# Altium PCB 03按键.PcbDoc (part 3 of 3)
Units mil, origin at the board's own origin, x right, y up, seen from the top; angles counter-clockwise.
Board outline 1673 x 1444 mil, 2 copper layers (Top Layer, Bottom Layer); 1 components, 7 nets, 11 pads, 20 vias.
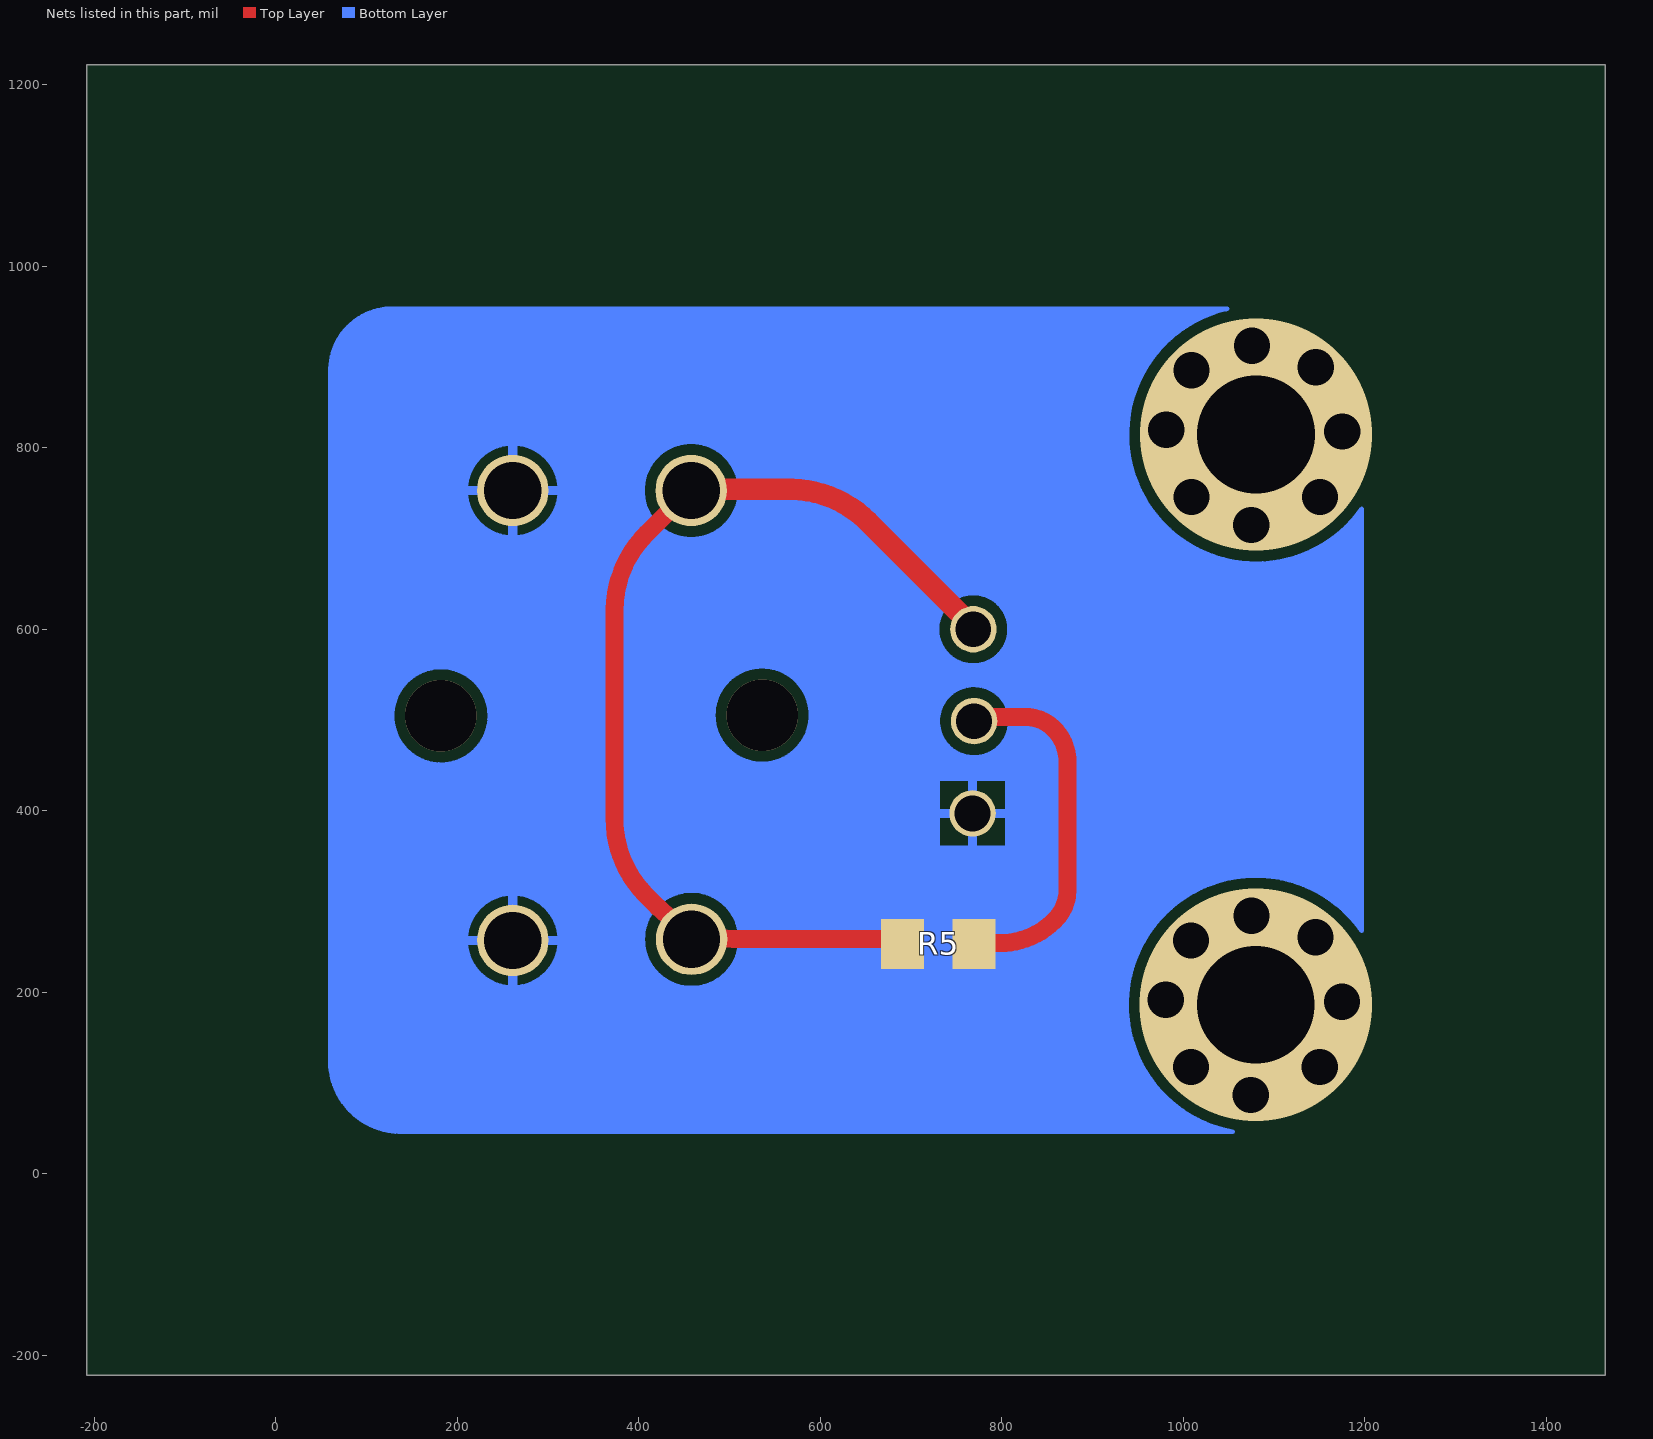
[diagram p3: the nets of this part, all layers, seen from the top]

## Via types
v1: diameter 40, hole 40, Top Layer to Bottom Layer, 16 vias
v2: diameter 255.91, hole 129.92, Top Layer to Bottom Layer, 2 vias
v3: diameter 78.74, hole 78.74, Top Layer to Bottom Layer, 2 vias

## Nets (pads, with @x,y where several pads share a name; then routed paths per layer and width w, separated by ;. In a path a pad name is that pad's centre, name@x,y a point inside that pad or via, vN(x,y) a via of type N, cw(c..) or ccw(c..) an arc to the next point about the centre after c; other vN are vias at no path point) (continued)
$Net0: (continued)
  Bottom Layer w5: 759.96,460.14 762.68,459.56 765.44,459.17 768.22,458.97 771,458.97 773.78,459.17 776.54,459.56 779.26,460.14 781.94,460.9 784.56,461.86 787.1,462.99 789.56,464.3 791.92,465.77 794.17,467.41 796.31,469.2 798.31,471.13 800.18,473.2 801.89,475.4 803.45,477.71 804.84,480.12 806.06,482.62 807.1,485.2 807.96,487.85 808.64,490.55 809.12,493.3 809.41,496.07 809.51,498.85 809.41,501.63 809.12,504.4 808.64,507.15 807.96,509.85 807.1,512.5 806.06,515.08 804.84,517.58 803.45,519.99 801.89,522.3 800.18,524.5 798.31,526.57 796.31,528.5 794.17,530.29 791.92,531.93 789.56,533.4 787.1,534.71 784.56,535.84 781.94,536.8 779.26,537.56 776.54,538.14 773.78,538.53 771,538.73 768.22,538.73 765.44,538.53 762.68,538.14 759.96,537.56 ; 759.96,460.14 757.28,460.9 754.66,461.86 752.12,462.99 749.66,464.3 747.3,465.77 745.05,467.41 742.91,469.2 740.91,471.13 739.04,473.2 737.33,475.4 735.77,477.71 734.38,480.12 733.16,482.62 732.12,485.2 731.26,487.85 730.58,490.55 730.1,493.3 729.81,496.07 729.71,498.85 729.81,501.63 730.1,504.4 730.58,507.15 731.26,509.85 732.12,512.5 733.16,515.08 734.38,517.58 735.77,519.99 737.33,522.3 739.04,524.5 740.91,526.57 742.91,528.5 745.05,530.29 747.3,531.93 749.66,533.4 752.12,534.71 754.66,535.84 757.28,536.8 759.96,537.56 ; 937.79,189.02 938.32,198.94 939.55,208.79 941.45,218.54 944.03,228.12 947.28,237.51 951.17,246.64 955.69,255.49 960.81,263.99 966.52,272.12 972.77,279.83 979.55,287.08 986.83,293.85 994.55,300.09 1002.69,305.77 1011.21,310.88 1020.06,315.37 1029.2,319.24 1038.6,322.46 1048.19,325.02 ; 1048.19,325.02 1057.94,326.91 1067.8,328.1 1077.72,328.61 1087.64,328.43 1097.53,327.55 1107.34,325.99 1117.01,323.74 1126.5,320.83 1135.77,317.26 1144.77,313.05 1153.44,308.23 1161.77,302.81 1169.69,296.82 1177.17,290.3 1184.19,283.27 1190.69,275.77 1196.66,267.83 1196.66,732.63 1193.78,728.7 1187.51,721 ; 728.88,600.1 728.98,597.32 729.27,594.55 729.75,591.8 730.43,589.1 731.29,586.45 732.33,583.87 733.55,581.37 734.94,578.96 736.5,576.65 738.21,574.45 740.08,572.38 742.08,570.45 744.22,568.66 746.47,567.02 748.83,565.55 751.29,564.24 753.83,563.11 756.45,562.15 759.13,561.39 761.85,560.81 764.61,560.42 767.39,560.22 770.17,560.22 772.95,560.42 775.71,560.81 778.43,561.39 781.11,562.15 783.73,563.11 786.27,564.24 788.73,565.55 791.09,567.02 793.34,568.66 795.48,570.45 797.48,572.38 799.35,574.45 801.06,576.65 802.62,578.96 804.01,581.37 805.23,583.87 806.27,586.45 807.13,589.1 807.81,591.8 808.29,594.55 808.58,597.32 808.68,600.1 808.58,602.88 808.29,605.65 807.81,608.4 807.13,611.1 806.27,613.75 805.23,616.33 804.01,618.83 802.62,621.24 801.06,623.55 799.35,625.75 797.48,627.82 795.48,629.75 793.34,631.54 791.09,633.18 788.73,634.65 786.27,635.96 783.73,637.09 781.11,638.05 778.43,638.81 775.71,639.39 772.95,639.78 770.17,639.98 767.39,639.98 764.61,639.78 761.85,639.39 759.13,638.81 756.45,638.05 753.83,637.09 751.29,635.96 748.83,634.65 746.47,633.18 744.22,631.54 742.08,629.75 740.08,627.82 738.21,625.75 736.5,623.55 734.94,621.24 733.55,618.83 732.33,616.33 731.29,613.75 730.43,611.1 729.75,608.4 729.27,605.65 728.98,602.88 728.88,600.1 ; 729.86,359.1 806.05,359.1 806.05,435.29 729.86,435.29 729.86,359.1
  Bottom Layer w10: 211.91,257.19 pad.3@261.28,257.19 ; 211.9,753.01 pad.3@261.27,753.01 ; 261.27,703.64 pad.3@261.27,753.01 ; 261.27,802.38 pad.3@261.27,753.01 ; 261.28,207.82 pad.3@261.28,257.19 ; 261.28,306.56 pad.3@261.28,257.19 ; 310.65,257.19 pad.3@261.28,257.19 ; 310.64,753.01 pad.3@261.27,753.01 ; 732.37,397.19 pad.2@767.96,397.19 ; 767.96,361.6 pad.2@767.96,397.19 ; 767.96,432.78 pad.2@767.96,397.19 ; 803.54,397.19 pad.2@767.96,397.19
$Net1: pad.1@768.36,253.85 pad.2@769.61,498.85 R5.1 | length 409.2
  Top Layer w19.68: R5.1@770.44,254.26 798,254.26 803.95,254.47 809.88,255.09 815.75,256.13 821.53,257.57 827.19,259.41 832.71,261.64 838.07,264.25 843.23,267.23 848.17,270.56 852.86,274.23 857.29,278.21 858.35,279.26 858.98,279.88 861.18,282.24 863.22,284.75 865.07,287.4 866.73,290.17 868.2,293.04 869.46,296.02 870.51,299.07 871.35,302.19 871.96,305.36 872.36,308.57 872.53,311.79 872.53,312.6 ; pad.2@770.43,503.45 826.29,503.45 827.06,503.44 830.14,503.28 833.2,502.9 836.23,502.31 839.2,501.52 842.12,500.51 844.96,499.31 847.7,497.91 850.34,496.32 852.87,494.55 855.27,492.61 857.52,490.51 858.15,489.87 860.54,487.22 862.74,484.4 864.74,481.44 866.53,478.34 868.09,475.13 869.43,471.81 870.54,468.42 871.4,464.95 872.02,461.43 872.4,457.87 872.52,454.3 ; 872.54,311.41 872.54,458.03
$Net2: pad.1@696.89,253.43 pad.2@768.78,600.1 pad.3@457.94,753 pad.3@458.36,258.42 R5.2 | length 1125.8
  Top Layer w19.68: pad.3@460.85,751.76 459.87,751.73 458.89,751.62 457.92,751.45 456.97,751.21 456.03,750.91 455.12,750.54 454.24,750.11 453.39,749.62 452.57,749.07 451.8,748.47 451.07,747.81 450.9,747.64 408.72,705.46 402.97,699.3 397.67,692.75 392.84,685.85 388.5,678.63 384.68,671.12 381.38,663.37 378.64,655.4 376.46,647.26 374.85,638.99 373.83,630.63 373.39,622.22 373.36,620.1 373.36,391.77 373.65,383.35 374.53,374.97 376,366.67 378.04,358.5 380.64,350.48 383.8,342.67 387.49,335.1 391.7,327.8 396.41,320.82 401.6,314.18 407.24,307.92 408.72,306.41 420.92,294.21 427.08,288.46 433.63,283.16 440.53,278.33 447.75,273.99 455.26,270.17 463.01,266.87 470.98,264.13 479.12,261.95 487.39,260.34 495.75,259.32 504.16,258.88 506.28,258.85 R5.2@690.03,258.85 ; pad.2@764.03,607.35 764.49,606.92 764.98,606.52 765.5,606.16 766.04,605.83 766.6,605.55 767.19,605.3 767.78,605.09 768.39,604.93 769.01,604.81 769.64,604.73 770.27,604.7 pad.2@770.44,604.7
  Top Layer w23.62: pad.3@485.44,754.26 567.12,754.26 569.24,754.23 577.65,753.79 586.01,752.77 594.28,751.16 602.42,748.98 610.39,746.24 618.14,742.94 625.65,739.12 632.87,734.78 639.77,729.95 646.32,724.65 652.48,718.9 pad.2@764.03,607.35
$Net3: 
  other v1: 1074.62,86.79 1008.77,117.61 1150.44,117.62 1175.03,189.71 980.87,191.79 1008.78,257.21 1145.87,260.54 1075.44,284.3
  other v2: 1080.02,186.37
$Net4: 
  other v1: 1075.03,715.1 1009.18,745.93 1150.85,745.93 1175.44,818.02 981.28,820.1 1009.19,885.52 1146.28,888.85 1075.85,912.61
  other v2: 1080.44,814.68
$Net5: 
  other v3: 182.11,504.69
$Net6: 
  other v3: 536.07,505.5

## Polygon pours and split planes (outlines as drawn)
no net on Top Overlay (hatched Horizontal grid 1 track 1): 377.39,102.49 365.34,102.49 365.34,102.91 365.34,102.51 365.34,101.95 365.34,101.23 365.34,100.34 365.34,99.2 365.26,98.02 365.26,96.66 365.26,95.21 365.17,93.62 365.17,91.92 365.09,90.23 364.93,86.63 364.8,83.54 377.39,83.54
no net on Top Overlay (hatched Horizontal grid 1 track 1): 143.97,85.83 130.14,85.83 124.28,73.53 123.63,73.53 124.04,73.43 124.42,73.28 125.05,73.2 125.76,72.96 126.57,72.8 127.55,72.55 128.58,72.24 130.83,71.67 133.16,70.95 135.57,70.31 137.51,69.68 137.3,69.43 137.37,69.62 137.63,70.15 137.93,70.67 138.27,71.42 138.73,72.18 139.14,73.16 139.71,74.28 140.26,75.46 140.81,76.81 141.37,78.26 141.93,79.69 142.49,81.29 143.12,82.94
no net on Top Overlay (hatched Horizontal grid 1 track 1): 189 vertices, not listed, extent 334.03,51.91 392.39,121.62
no net on Top Overlay (hatched Horizontal grid 1 track 1): 170 vertices, not listed, extent 110.41,52.52 157.37,102.18
no net on Top Overlay (hatched Horizontal grid 1 track 1): 182.29,118.59 180.27,116.83 180.27,116.73 180.25,116.71 180.16,116.42 179.99,116.09 179.65,115.26 179.27,114.23 178.78,113.03 178.21,111.66 177.01,108.25 184.02,108.25 186.76,111.08 190.19,107.41 176.58,107.41 176.58,107.04 176.51,106.97 176.3,106.56 176.14,106.15 175.93,105.64 175.6,105.07 174.89,103.64 174,102.11 173.13,100.43 172.17,98.76 170.74,96.4 182.5,96.4 185.25,99.22 188.65,95.64 180.27,95.64 180.27,82.54 183.69,82.54 186.51,85.29 189.87,81.7 180.27,81.7 180.27,62.77 189.1,68.1 189.18,67.97 189.44,68.22 189.07,67.94 188.67,67.45 188.13,66.92 187.39,66.27 186.58,65.45 184.82,63.69 182.89,61.77 181.04,59.83 180.15,58.86 179.41,57.96 178.77,57.16 178.62,56.97 176.29,60.24 176.16,60.1 176.25,60.38 176.48,60.69 176.76,61.33 176.92,62.01 177.17,62.93 177.26,63.95 177.34,65.16 177.34,81.7 175.86,81.7 175.08,81.62 174.08,81.62 172.93,81.46 171.73,81.3 170.42,81.13 169.38,80.87 167.72,82.54 177.34,82.54 177.34,95.64 170.54,95.64 170.29,95.39 170.04,95.05 169.73,94.67 169.25,94.11 168.68,93.45 168.14,92.74 167.06,91.54 166.92,91.63 166.78,91.35 167.02,91.76 167.43,92.5 167.92,93.47 168.56,94.76 169.28,96.2 170.08,97.89 170.97,99.82 171.85,101.92 172.75,104.25 173.71,106.74 174.6,109.49 175.48,112.3 176.36,115.27 177.17,118.41 177.74,120.98
no net on Top Overlay (hatched Horizontal grid 1 track 1): 108.63,118.03 106.33,116.2 106.33,103.69 108.89,103.69 111.72,106.52 115.34,102.85 106.33,102.85 106.33,88.48 114.49,93.48 114.68,93.12 106.33,86.9 106.33,58.61 106.33,58.53 106.33,58.45 106.27,58.26 106.19,57.86 105.97,57.05 105.5,55.95 105.21,55.35 104.83,54.75 104.4,54.16 103.85,53.62 103.16,52.99 102.48,52.46 101.66,51.93 101.33,51.78 101.33,51.08 101.33,51.24 101.14,51.8 100.88,52.55 100.6,53.11 100.25,53.57 99.75,54.15 99.24,54.66 98.56,55.26 97.73,55.75 96.83,56.32 95.75,56.91 94.43,57.4 93.4,57.76 93.4,58.35 93.06,58.35 93.25,58.29 93.71,58.19 94.67,58.12 95.8,57.95 97.07,57.79 98.29,57.63 99.49,57.55 100.4,57.47 100.59,57.47 100.85,57.56 101.33,57.66 101.86,57.97 102.25,58.37 102.72,59.02 103,59.87 103.09,60.92 103.09,85.13 102.23,84.26 101.98,84.09 101.64,83.83 101.14,83.42 100.58,82.94 100.03,82.47 98.57,81.26 97.12,79.97 95.75,78.68 95.11,78.02 94.53,77.45 94.02,76.85 94.05,76.89 91.03,80.38 90.22,80.38 90.36,80.53 90.45,80.55 90.8,80.64 91.25,80.82 91.75,81.07 92.37,81.38 93.09,81.7 93.91,82.03 94.82,82.52 95.83,83.07 97.06,83.64 98.24,84.35 99.69,85.08 101.24,85.89 103.09,87.01 103.09,102.85 94.69,102.85 92.17,102.33 90.82,103.69 103.09,103.69 103.09,104.27 103.09,104.59 103.09,105.15 103.09,105.79 103.09,106.67 103.09,107.63 103.09,108.75 103.09,110.06 103.01,111.32 103.01,112.77 102.93,115.65 102.85,118.7 102.79,120.91
no net on Top Overlay (hatched Horizontal grid 1 track 1): 340.32,118 337.74,115.96 337.74,98.24 342.7,98.24 346.09,101.64 350.33,97.4 337.74,97.4 337.74,71.53 351.18,74.52 351.21,74.41 351.57,74.41 351.43,74.26 351.08,74.15 350.27,73.91 349.21,73.58 348,73.1 346.64,72.62 345.04,72.06 343.45,71.5 339.99,70.3 338.3,69.66 336.63,69.01 335.03,68.45 333.57,67.88 332.19,67.32 331.19,66.88 331.07,66.88 330.78,66.73 330.56,66.58 330.19,66.44 329.29,66.03 328.22,65.45 327.16,64.8 326.17,64.14 325.76,63.81 325.31,63.45 325,63.04 325.26,63.55 322.73,68.28 322.23,68.28 322.49,68.38 322.75,68.44 323.17,68.44 323.73,68.6 324.35,68.69 325.11,68.78 325.92,68.94 326.79,69.1 327.84,69.26 328.86,69.49 330.07,69.66 331.3,69.9 332.63,70.22 334.5,70.53 334.5,97.4 330.93,97.4 330.15,97.32 329.15,97.32 328,97.16 326.81,97 325.5,96.83 324.45,96.57 322.79,98.24 334.5,98.24 334.5,98.82 334.5,98.9 334.5,99.14 334.5,99.46 334.5,100.34 334.5,101.54 334.5,102.91 334.5,104.51 334.5,106.19 334.5,108.04 334.42,111.88 334.42,113.73 334.34,115.56 334.34,117.34 334.26,118.85 334.26,120.31 334.24,120.63
no net on Top Overlay (hatched Horizontal grid 1 track 1): 188 vertices, not listed, extent 181.14,52.34 237.35,113.49
no net on Top Overlay (hatched Horizontal grid 1 track 1): 158 vertices, not listed, extent 244.26,51.48 271.91,121.59
no net on Top Overlay (hatched Horizontal grid 1 track 1): 221.18,118.9 219.27,117.5 219.27,111.3 226.63,111.3 228.83,113.49 231.73,110.6 229.85,109.35 229.85,102.49 231.2,102.49 233.7,104.99 236.81,101.64 229.85,101.64 229.85,101.07 229.85,100.9 229.85,100.5 229.85,100.1 229.85,99.54 229.85,98.89 229.93,97.46 229.93,95.85 230.01,94.16 230.09,92.47 230.15,91.23 227.24,90.1 227.24,92.27 219.27,92.27 219.27,83.42 226.95,83.42 229.77,86.25 233.13,82.58 219.27,82.58 219.27,73.17 229.03,73.17 231.86,75.92 235.27,72.33 219.27,72.33 219.27,71.75 219.27,71.59 219.27,71.19 219.27,70.79 219.27,70.23 219.27,69.65 219.35,68.22 219.35,66.61 219.43,64.91 219.52,63.32 219.57,62.14 216.67,60.82 216.67,60.13 216.67,60.45 216.67,60.86 216.67,61.42 216.67,62.06 216.67,62.86 216.67,64.62 216.67,66.54 216.67,68.46 216.67,70.31 216.67,71.11 216.67,72.33 212.79,72.33 212.01,72.25 211,72.25 209.85,72.09 208.66,71.93 207.35,71.76 206.31,71.5 204.64,73.17 216.67,73.17 216.67,82.58 214.87,82.58 214.09,82.5 213.09,82.5 212.02,82.34 210.73,82.18 209.51,82.01 208.47,81.75 206.81,83.42 216.67,83.42 216.67,92.27 215.65,92.27 215.13,92.19 214.36,92.19 213.45,92.02 212.42,91.87 211.18,91.7 210.23,91.45 208.56,93.12 216.67,93.12 216.67,101.64 212.47,101.64 211.68,101.57 210.68,101.57 209.53,101.4 208.34,101.24 207.03,101.07 205.99,100.81 204.32,102.49 216.67,102.49 216.67,110.46 215.58,110.46 214.97,110.38 214.05,110.38 212.98,110.21 211.85,110.05 210.62,109.88 209.67,109.64 208.01,111.3 216.67,111.3 216.67,111.88 216.67,112.04 216.67,112.28 216.67,112.68 216.67,113.16 216.67,113.64 216.67,115.01 216.59,116.46 216.51,118.15 216.43,119.91 216.38,120.96
no net on Top Overlay (hatched Horizontal grid 1 track 1): 122.11,107.61 151.51,107.61 154.03,110.44 158,106.53 158.98,106.53 158.63,106.41 158.31,106.25 157.94,106.1 157.41,105.93 156.84,105.6 156.17,105.26 155.43,104.77 154.68,104.28 153.84,103.6 153.03,102.8 152.06,101.89 151.16,100.91 150.19,99.78 149.41,98.83 149.19,98.95 152.35,106.85 122.11,106.85 122.11,106.27 122.11,106.11 122.11,105.79 122.11,105.47 122.11,104.5 121.96,103.41 121.73,102.24 121.42,101.09 120.94,100.25 120.65,99.9 120.28,99.59 120.27,99.59 120.02,99.53 119.61,99.28 119.18,99.16 118.63,99.08 118.05,99 117.47,99.07 116.99,99.31 116.9,99.4 116.73,99.48 116.61,99.6 116.52,99.77 116.47,100.1 116.47,100.48 116.64,100.89 117.04,101.44 117.12,101.52 117.39,101.78 117.63,102.11 118.04,102.6 118.93,103.73 119.76,104.88 119.93,105.04 120.02,105.33 120.27,105.83 120.51,106.48 120.84,107.31 121.17,108.46 121.5,109.77 121.74,110.98 122.11,110.98
no net on Top Overlay (hatched Horizontal grid 1 track 1): 186 vertices, not listed, extent 263.56,51.46 314.61,102.93
no net on Top Overlay (hatched Horizontal grid 1 track 1): 130.7,121.18 131.01,120.98 131.3,120.84 132.11,120.28 133.13,119.57 134.17,118.77 135.27,117.99 136.22,117.19 137,116.49 137.08,116.41 137.27,116.22 137.49,115.92 137.8,115.47 138.1,114.94 138.4,114.35 138.53,113.75 138.53,113.08 138.53,113 138.53,112.82 138.48,112.6 138.33,112.16 138.12,111.66 137.75,111.23 137.38,110.7 136.77,110.17 136.76,110.15 136.65,110.12 136.4,110.05 136.17,110.05 135.95,110.14 135.6,110.5 135.47,110.76 135.25,111.13 135.12,111.52 134.97,112.12 134.97,112.28 134.86,112.6 134.79,112.82 134.54,113.65 134.05,114.8 133.48,116.09 132.67,117.73 131.6,119.52 130.54,121.01 130.92,121.23 130.65,121.23
no net on Top Overlay (hatched Horizontal grid 1 track 1): 300.93,119.23 298.65,117.5 298.65,111.54 305.37,111.54 308.85,115.01 313.08,110.78 298.65,110.78 298.65,110.12 298.65,109.72 298.65,109.06 298.73,108.27 298.73,107.37 298.81,106.39 298.89,105.43 298.94,104.85 295.73,103.7 295.73,110.78 284.4,110.78 284.4,104.82 281.15,103.17 281.15,102.43 281.14,102.43 281.23,102.95 281.23,103.67 281.31,104.71 281.39,105.85 281.39,107.2 281.47,108.74 281.47,110.78 273.38,110.78 270.87,110.19 269.47,111.54 281.47,111.54 281.47,112.12 281.47,112.2 281.47,112.44 281.47,112.84 281.47,113.24 281.47,113.72 281.47,114.93 281.39,116.46 281.31,118.23 281.23,120.23 281.18,121.58 286.34,119.22 284.4,117.74 284.4,111.54 295.73,111.54 295.73,112.12 295.73,112.28 295.73,112.52 295.73,112.92 295.73,113.4 295.73,113.96 295.73,115.33 295.65,116.94 295.57,118.79 295.49,120.71 295.44,121.88

## Keep-outs
Keep-Out Layer:
  lines w3.94: 43.98,123.95 43.98,885.37 ; 43.98,124.26 44.19,117.71 44.85,111.2 45.97,104.75 47.53,98.39 49.53,92.15 51.97,86.07 54.82,80.18 58.07,74.5 61.72,69.05 65.73,63.88 70.1,59 74.79,54.44 79.79,50.21 85.08,46.34 90.62,42.85 96.39,39.76 102.37,37.08 108.51,34.82 114.8,32.99 121.2,31.61 127.68,30.68 134.22,30.2 137.48,30.13 ; 43.98,885.65 44.04,888.59 44.47,894.46 45.31,900.29 46.55,906.05 48.19,911.7 50.23,917.22 52.64,922.59 55.42,927.78 58.56,932.76 62.03,937.52 65.83,942.01 69.93,946.23 74.32,950.16 78.97,953.77 83.86,957.04 88.97,959.97 94.27,962.53 99.74,964.72 105.34,966.52 111.06,967.93 116.86,968.93 122.72,969.52 128.6,969.71 ; 128.32,969.68 1134.18,969.68 ; 137.8,30.13 1144.34,30.13 ; 1134.44,969.6 1137.19,969.54 1142.67,969.14 1148.11,968.36 1153.49,967.2 1158.77,965.66 1163.92,963.77 1168.94,961.51 1173.79,958.92 1178.44,955.99 1182.87,952.74 1187.07,949.2 1191.02,945.36 1194.68,941.27 1198.05,936.92 1201.11,932.36 1203.84,927.59 1206.24,922.64 1208.28,917.53 1209.96,912.3 1211.27,906.96 1212.21,901.54 1212.77,896.07 1212.94,890.58 ; 1144.11,30.13 1148.9,30.28 1153.66,30.77 1158.38,31.58 1163.02,32.72 1167.58,34.19 1172.03,35.97 1176.34,38.05 1180.49,40.43 1184.47,43.09 1188.25,46.03 1191.82,49.22 1195.16,52.65 1198.25,56.31 1201.08,60.17 1203.63,64.23 1205.89,68.45 1207.85,72.81 1209.5,77.31 1210.84,81.9 1211.85,86.58 1212.53,91.32 1212.88,96.1 1212.94,98.49 ; 1212.94,98.72 1212.94,890.84

## Silkscreen, mask and mechanical layers (free items; w line width, h text height)
Top Overlay:
  rectangle: 219.77,93.62 226.74,101.14
  rectangle: 219.77,102.99 226.74,109.96
  rectangle: 279.45,83.04 301.88,90.25
  rectangle: 279.45,92.09 301.88,99.06
  lines w3.94: 651.06,383.44 690.43,383.44 651.06,357.2 690.43,357.2 ; 651.91,448.43 691.27,463.42 651.91,478.42 ; 660.44,348.2 656.69,346.33 652.94,342.58 651.06,338.83 651.06,331.33 652.94,327.58 656.69,323.83 660.44,321.96 666.06,320.08 675.43,320.08 681.06,321.96 684.8,323.83 688.55,327.58 690.43,331.33 690.43,338.83 688.55,342.58 684.8,346.33 681.06,348.2 675.43,348.2 675.43,338.83 ; 661.28,511.59 657.53,509.72 653.78,505.97 651.91,502.22 651.91,494.72 653.78,490.97 657.53,487.22 661.28,485.35 666.9,483.48 676.28,483.48 681.9,485.35 685.65,487.22 689.4,490.97 691.27,494.72 691.27,502.22 689.4,505.97 685.65,509.72 681.9,511.59 ; 661.28,550.77 657.53,548.89 653.78,545.14 651.91,541.39 651.91,533.9 653.78,530.15 657.53,526.4 661.28,524.52 666.9,522.65 676.28,522.65 681.9,524.52 685.65,526.4 689.4,530.15 691.27,533.9 691.27,541.39 689.4,545.14 685.65,548.89 681.9,550.77 ; 650.23,588.83 650.23,601.95 652.11,607.58 655.86,611.33 659.6,613.2 665.23,615.07 674.6,615.07 680.22,613.2 683.97,611.33 687.72,607.58 689.59,601.95 689.59,588.83 650.23,588.83 ; 650.23,635.13 650.23,642.63 652.11,646.38 655.86,650.13 659.6,652 665.23,653.87 674.6,653.87 680.22,652 683.97,650.13 687.72,646.38 689.59,642.63 689.59,635.13 687.72,631.38 683.97,627.63 680.22,625.76 674.6,623.88 665.23,623.88 659.6,625.76 655.86,627.63 652.11,631.38 650.23,635.13 ; 651.06,394.31 651.06,407.43 652.94,413.05 656.69,416.8 660.44,418.68 666.06,420.55 675.43,420.55 681.06,418.68 684.8,416.8 688.55,413.05 690.43,407.43 690.43,394.31 651.06,394.31
  text "P8" at 835,530 h30
  text "P7" at 275,525 h30